# EAGLE board Alat_Cuci_Beras (EAGLE 9.6.2)
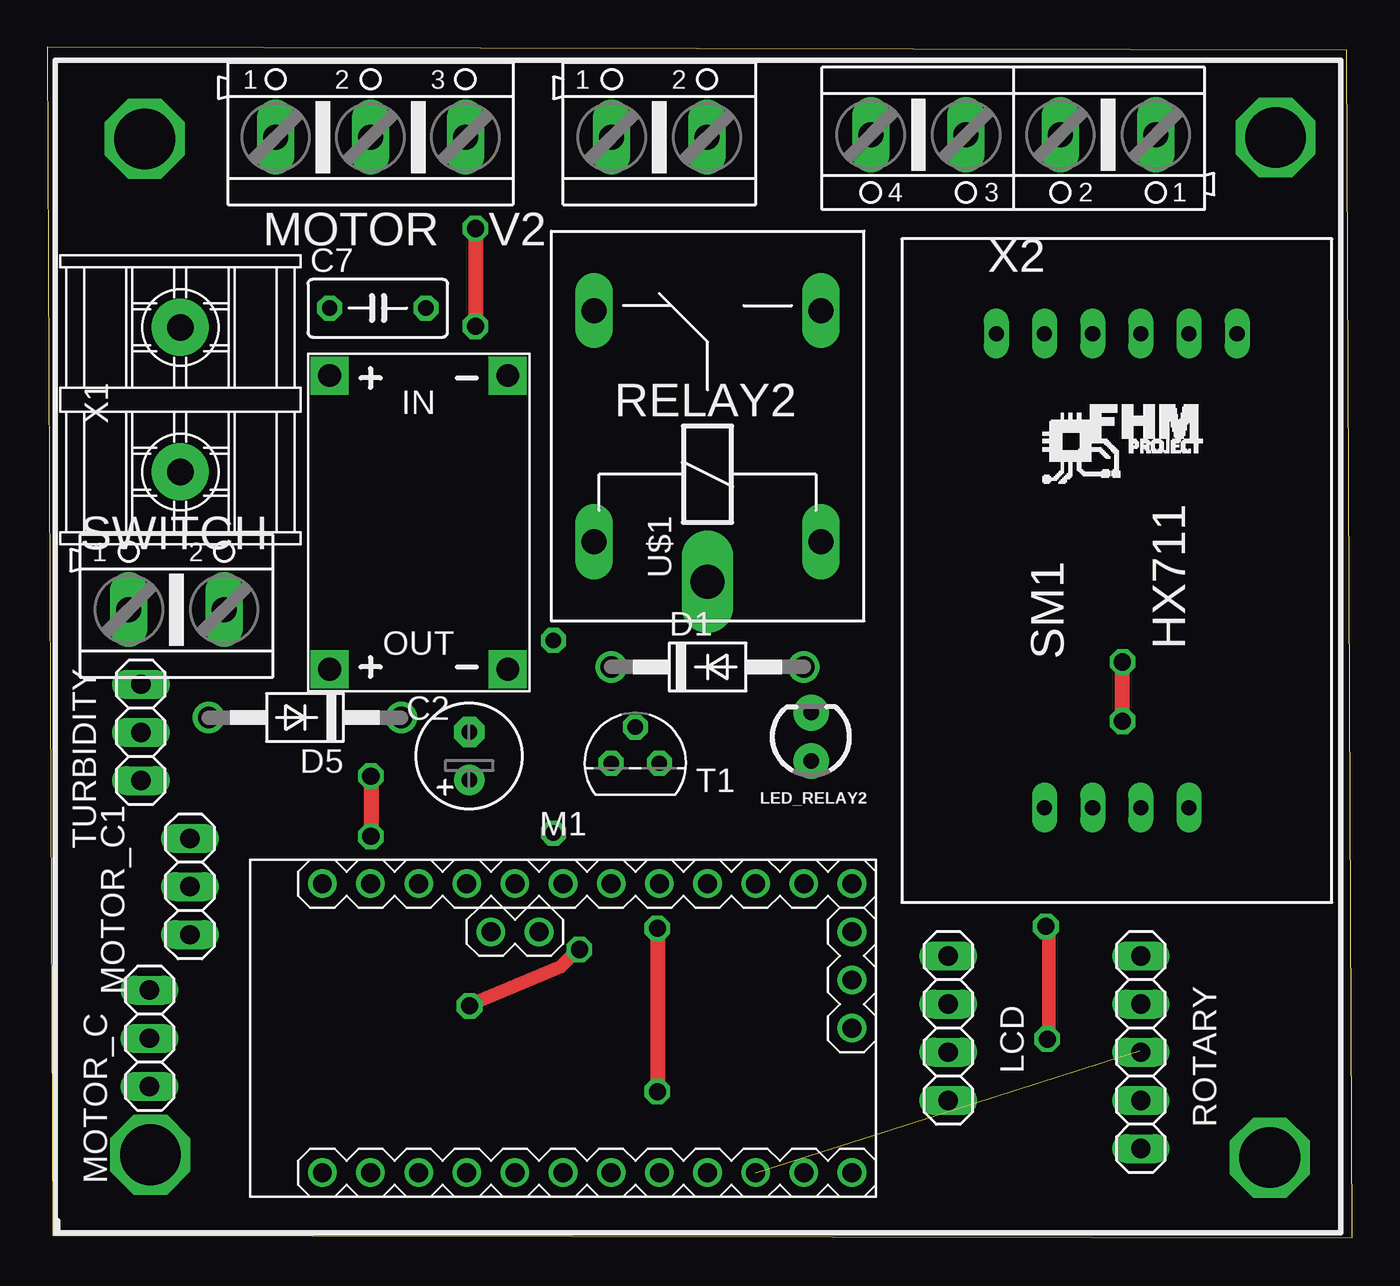
[diagram p0: board, top side]
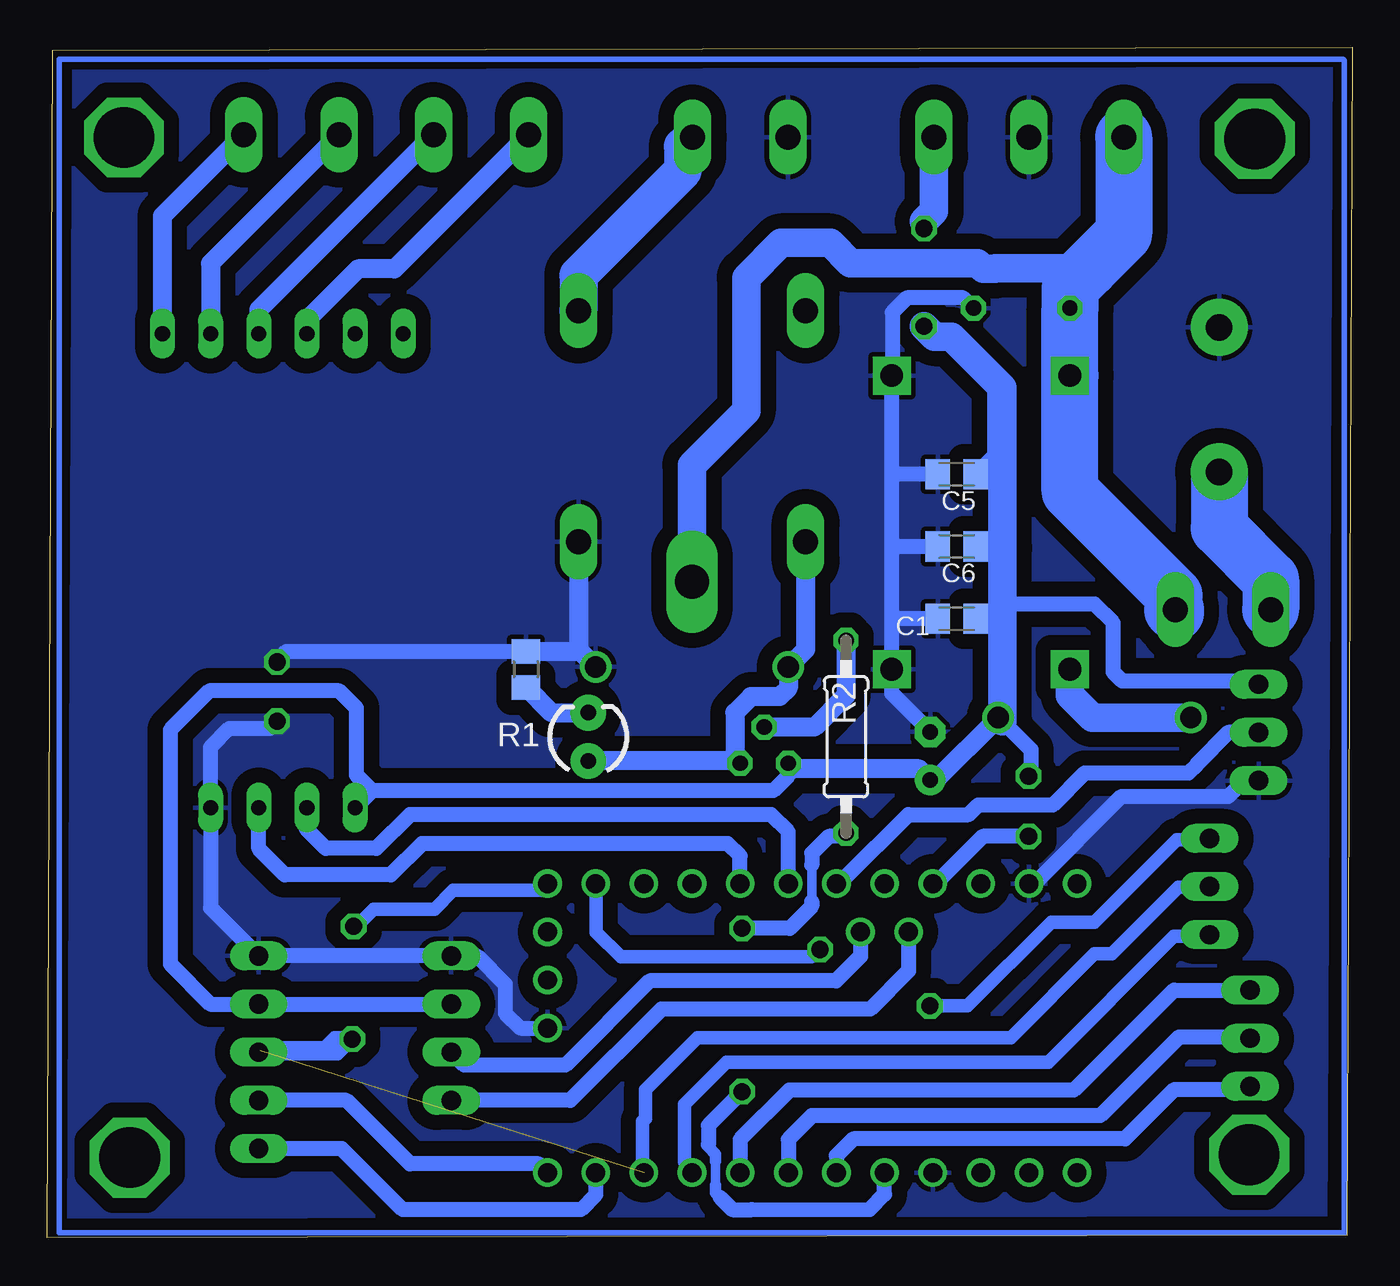
[diagram p1: board, bottom side, seen from below]

Size 68.83 x 62.78 mm. Coordinates in mm from the lower left corner, seen from the top.
Outline: 0.28,0.14 68.83,0 68.55,62.64 0,62.78 0.28,0.14
Copper layers (1*16): Top 0.035mm / dielectric 1.5mm / Bottom 0.035mm
Design rules "default": minimum track width 6mil, minimum drill 0.35mm, track to track 6mil, track to pad 6mil, pad to pad 6mil, via to via 6mil, smd to smd 6mil, copper to edge 40mil, drill to drill 6mil, minimum pad ring 10mil, minimum via ring 8mil, stop-mask expansion 4mil, vias tented up to drill 0mil, thermal gap 10mil

## Footprints (pad centres in the part's own frame; a part is rotated, then mirrored left to right if it is on the bottom)
C0805K = smd 1.3 x 1.6: 1 -1,0; 2 1,0
E2,5-6 = drill 0.813 pad 1.6: + -1.27,0 | drill 0.813 pad 1.6 octagon: - 1.27,0
C050-030X075 = drill 0.813 octagon: 1 -2.54,0; 2 2.54,0
DO41-10 = drill 1.118: A 5.08,0; C -5.08,0
1X04 = drill 1.016 long: 1 -3.81,0; 2 -1.27,0; 3 1.27,0; 4 3.81,0
LED_3MM = drill 0.813 pad 1.88: A -1.27,0; K 1.27,0
ARDUINO-PRO-MINI#NP = drill 1: J2.1 -1.27,5.08; J2.2 -3.81,5.08; J3.1 15.24,0; J3.2 15.24,2.54; J3.3 15.24,5.08; J6.1 -12.7,7.62; J6.2 -10.16,7.62; J6.3 -7.62,7.62; J6.4 -5.08,7.62; J6.5 -2.54,7.62; J6.6 0,7.62; J6.7 2.54,7.62; J6.8 5.08,7.62; J6.9 7.62,7.62; J6.10 10.16,7.62; J6.11 12.7,7.62; J6.12 15.24,7.62; J7.1 15.24,-7.62; J7.2 12.7,-7.62; J7.3 10.16,-7.62; J7.4 7.62,-7.62; J7.5 5.08,-7.62; J7.6 2.54,-7.62; J7.7 0,-7.62; J7.8 -2.54,-7.62; J7.9 -5.08,-7.62; J7.10 -7.62,-7.62; J7.11 -10.16,-7.62; J7.12 -12.7,-7.62
AK500/3 = drill 1.321 long: 1 -5.004,0; 2 0,0; 3 5.004,0
1X03 = drill 1.016 long: 1 -2.54,0; 2 0,0; 3 2.54,0
R0805 = smd 1.3 x 1.5: 1 -0.95,0; 2 0.95,0
0207/10 = drill 0.813 octagon: 1 -5.08,0; 2 5.08,0
ZF112 = drill 1.321 long: 1 -6.096,5.994; 2 -6.096,-5.994; O 6.096,5.994; S 6.096,-5.994 | drill 1.803 long: P -8.204,0
1X05 = drill 1.016 long: 1 -5.08,0; 2 -2.54,0; 3 0,0; 4 2.54,0; 5 5.08,0
HX711 = drill 0.8 long: A0 -12.5,6.35; A1 -12.5,3.81; A2 -12.5,1.27; A3 -12.5,-1.27; A4 -12.5,-3.81; A5 -12.5,-6.35; D0 12.5,3.81; D1 12.5,1.27; D2 12.5,-1.27; D3 12.5,-3.81
AK500/2 = drill 1.321 long: 1 -2.515,0; 2 2.515,0
TO92 = drill 0.813 octagon: 1 1.27,0; 2 0,1.905; 3 -1.27,0
DC-DC-STEP-DOWN-MP2307 = drill 1.2 pad 2 square: IN+ -7.747,-4.699; IN- -7.747,4.699; OUT+ 7.747,-4.699; OUT- 7.747,4.699
PCB_TERMINAL_2PIN = drill 1.4 pad 3: 1 -3.81,0; 2 3.81,0
AK500/4 = drill 1.321 long: 1 -7.518,0; 2 -2.489,0; 3 2.489,0; 4 7.518,0

## Placement (x,y rotation side)
C1  100nF  [C0805K]  20.86,32.65 180 bottom
C2  [E2,5-6]  22.25,25.41 90 top
C5  100nF  [C0805K]  20.86,40.27 180 bottom
C6  100nF  [C0805K]  20.86,36.46 180 bottom
C7  [C050-030X075]  17.43,49.03 0 top
D1  1N4004  [DO41-10]  34.83,30.11 0 top
D5  1N4004  [DO41-10]  13.59,27.44 180 top
FRAME1  FRAME-LETTER  [CREATIVE_COMMONS]  10.46,-9.64 0 top  (outside the outline)
LCD  [1X04]  47.53,11.06 270 top
LED_RELAY2  [LED_3MM]  40.29,26.42 90 top
M1  ARDUINO-PRO-MINI-5.0V#NP  [ARDUINO-PRO-MINI#NP]  27.21,11.06 0 top
MOTOR  [AK500/3]  17.05,58.05 0 top
MOTOR_C  [1X03]  5.39,10.52 270 top
MOTOR_C1  [1X03]  7.52,18.52 270 top
R1  1k  [R0805]  43.59,29.98 270 bottom
R2  1k  [0207/10]  26.7,26.42 90 bottom
RELAY2  ZF112  [ZF112]  34.83,42.81 90 top
ROTARY  [1X05]  57.69,9.79 270 top
SM1  [HX711]  56.42,35.19 270 top
SWITCH  [AK500/2]  6.81,33.13 0 top
T1  BC547  [TO92]  31.02,25.03 0 top
TURBIDITY  [1X03]  4.93,26.65 270 top
U$1  DC-DC-STEP-DOWN-MP2307  [DC-DC-STEP-DOWN-MP2307]  19.59,37.73 270 top
V2  [AK500/2]  32.29,58.05 0 top
X1  PCB_TERMINAL_2PIN  [PCB_TERMINAL_2PIN]  7.01,44.2 90 top
X2  [AK500/4]  50.96,58.17 180 top

## Library data of the parts
C1 C2 C5-C7 = rcl; SPICEPREFIX: C
D1 D5 = diode
FRAME1 = SparkFun-Aesthetics
LCD MOTOR_C MOTOR_C1 ROTARY TURBIDITY = pinhead
LED_RELAY2 = SparkFun-LED; PROD_ID: DIO-08794
M1 U$1 = diy-modules
MOTOR SWITCH V2 X2 = con-ptr500; OC_FARNELL: unknown; OC_NEWARK: unknown
R1 R2 = rcl; SPICEPREFIX: R
RELAY2 = relay; OC_FARNELL: unknown; OC_NEWARK: unknown
SM1 = hx711
T1 = transistor
X1 = PCB_Terminal

## Nets
12V: C7.1 MOTOR.1 RELAY2.P SWITCH.2 U$1.IN+
A0: M1.J6.8 SM1.D1
A1: M1.J6.7 SM1.D2
A2: M1.J6.6 TURBIDITY.2
A3: M1.J6.5
A6: M1.J3.2
A7: M1.J3.3
D2: M1.J7.8 R2.1
D3: M1.J7.7 MOTOR_C.3
D4: M1.J7.6 MOTOR_C.2
D5: M1.J7.5 MOTOR_C.1
D6: M1.J7.4
D7: M1.J7.3 ROTARY.3
D8: M1.J7.2 ROTARY.5
D9: M1.J7.1 ROTARY.4
D10: M1.J6.12
D11: M1.J6.11
D12: M1.J6.10
D13: M1.J6.9
GND: C1.2 C2.- C5.2 C6.2 C7.2 D1.A LCD.1 M1.J3.1 M1.J6.2 M1.J7.9 MOTOR.2 R1.1 RELAY2.2 ROTARY.1 SM1.D0 TURBIDITY.3 U$1.IN- U$1.OUT- V2.1 X1.2
N$1: D1.C LED_RELAY2.A RELAY2.1 T1.1
N$2: SWITCH.1 X1.1
N$3: D5.A U$1.OUT+
N$4: LED_RELAY2.K R1.2
N$5: R2.2 T1.2
N$6: SM1.A0 X2.1
N$7: SM1.A1 X2.2
N$8: SM1.A2 X2.3
N$9: RELAY2.S V2.2
N$10: SM1.A3 X2.4
RAW: M1.J6.1
RX: M1.J7.11
SCL: LCD.4 M1.J2.2
SDA: LCD.3 M1.J2.1
TX: M1.J7.12
VCC: C1.1 C2.+ C5.1 C6.1 D5.C LCD.2 M1.J6.4 MOTOR.3 ROTARY.2 SM1.D3 T1.3 TURBIDITY.1

## Tracks (layer width: path | path; a pad name or v marks a point on that pad's centre or on a via)
12V
  Bottom 1.5: 13.85,51.13 18.81,51.13 18.85,51.09 19.45,51.09 19.76,51.4 26.47,51.4 27.53,52.47 30.12,52.47 31.95,50.64 31.95,43.63 34.83,40.75 RELAY2.P
  Bottom 3: SWITCH.2 9.33,32.96 9.4,33.04 | 9.47,33.11 9.4,33.04 | 9.4,33.04 9.4,33.88 14.89,39.37 U$1.IN+ C7.1 14.89,50.1 13.85,51.13 12.04,52.94 MOTOR.1
A0
  Bottom 0.8: M1.J6.8 32.29,20.14 32.94,20.79 49.07,20.79 50.72,19.14 56.31,19.14 57.69,20.52 SM1.D1
A1
  Bottom 0.8: M1.J6.7 29.75,21.41 30.66,22.32 49.71,22.32 51.48,20.54 54.15,20.54 55.17,21.55 55.17,22.67 SM1.D2
A2
  Bottom 0.8: M1.J6.6 26.87,19.01 26.72,19.01 23.42,22.32 20.24,22.32 19.73,22.82 15.8,22.82 14.12,24.5 8.63,24.5 8.18,24.96 8.18,25.01 6.53,26.65 TURBIDITY.2
D2  (via drill 0.9)
  Top 0.8: v32.18,16.32 v32.18,7.71
  Bottom 0.5: 28.5,19.65 28.5,17.74 | 33.58,4.03 33.58,2.76
  Bottom 0.6: 33.96,4.92 33.96,4.79 33.58,4.41 33.58,4.03 | 33.58,2.76 33.58,2.38 33.32,2.12
  Bottom 0.8: R2.1 26.87,21.17 27.61,21.17 28.5,20.28 28.5,19.65 | 28.5,17.74 28.5,17.49 29.67,16.32 v32.18,16.32 | v32.18,7.71 33.96,5.93 33.96,4.92 | 33.32,2.12 32.69,1.49 31.67,1.49 25.45,1.5 24.67,2.29 M1.J7.8
D3
  Bottom 0.8: MOTOR_C.3 5.54,7.83 9.38,7.83 11.99,5.22 26.31,5.22 27.21,4.33 M1.J7.7
D4
  Bottom 0.8: MOTOR_C.2 5.47,10.6 9.13,10.6 13.28,6.44 28.5,6.44 29.75,5.19 M1.J7.6
D5
  Bottom 0.8: MOTOR_C.1 9.4,13.06 14.68,7.79 29.69,7.79 32.29,5.19 M1.J7.5
D7  (1 unrouted)
  Bottom 0.8: 57.6,9.87 ROTARY.3
D8
  Bottom 0.8: M1.J7.2 39.91,2.27 40.69,1.49 50.09,1.49 53.3,4.71 ROTARY.5
D9
  Bottom 0.8: M1.J7.1 42.91,3.9 49.71,3.9 53.05,7.25 ROTARY.4
GND  (via drill 0.9)
  Top 0.8: v56.72,27.24 v56.72,30.37
  Bottom 0.3: 0.4,0.27 68.22,0.27 68.22,62.14 0.48,62.14 0.4,62.07 0.4,0.27
  Bottom 0.8: C7.2 20.51,49.57 23.49,49.57 24.26,48.81 24.26,45.5 U$1.IN- 24.29,40.12 | 24.29,32.58 U$1.OUT- 24.29,28.71 C2.- | 24.29,32.58 24.29,36.24 | 24.29,36.24 24.29,40.12 | C5.2 24.14,40.27 24.29,40.12 | C6.2 24.07,36.46 24.29,36.24 | C1.2 24.22,32.65 24.29,32.58 | TURBIDITY.3 5.69,24.11 6.53,23.27 12.17,23.27 16.77,18.68 M1.J6.2 | M1.J3.1 43.88,11.06 44.68,11.85 44.68,13.38 46.17,14.87 LCD.1 ROTARY.1 60.23,17.41 SM1.D0 60.23,25.87 59.23,26.86 57.1,26.86 v56.72,27.24 | v56.72,30.37 56.34,30.75 56.34,30.83 56.23,30.93 R1.1
  Bottom 1: RELAY2.2 40.82,31.02 40.73,30.93 | 40.73,30.93 D1.A | R1.1 40.73,30.93
  pour Bottom (isolate 0.8): 0.43,0.22 68.25,0.22 68.25,62.07 0.43,62.07
N$1
  Bottom 1: RELAY2.1 28.83,31.02 D1.C 29.75,28.99 30.2,28.54 31.72,28.54 32.56,27.7 32.56,25.3 T1.1 32.41,25.15 LED_RELAY2.A
N$2
  Bottom 3: X1.1 7.01,37.44 4.3,34.72 SWITCH.1
N$3
  Bottom 1.5: D5.A 13.71,27.44 14.89,28.62 U$1.OUT+
N$4
  Bottom 1: R1.2 42.25,27.69 LED_RELAY2.K
N$5
  Bottom 1: R2.2 26.7,28.61 28.38,26.93 T1.2
N$6
  Bottom 1: X2.1 62.77,53.88 SM1.A0
N$7
  Bottom 1: X2.2 60.23,51.39 SM1.A1
N$8
  Bottom 1: X2.3 57.69,48.95 SM1.A2
N$9
  Bottom 2: V2.2 35.3,57.54 35.3,56.28 40.82,50.76 RELAY2.S
N$10
  Bottom 1: X2.4 50.52,51.09 52.45,51.09 55.19,48.35 55.19,47.73 SM1.A3
N$11  (via drill 3.2)
  other vias: 64.79,58.03
N$12  (via drill 3.2)
  other vias: 64.49,4.23
N$13  (via drill 3.2)
  other vias: 5.13,57.95
N$14  (via drill 3.2)
  other vias: 5.43,4.38
S$1
  Bottom 0.7: 42.39,18.79 42.85,18.33 47.42,18.33 48.41,17.34 51.61,17.34 52.6,16.35
S$2  (via drill 0.9)
  other vias: 52.68,16.42
S$3  (via drill 0.9)
  Bottom 0.7: v52.75,10.48 53.52,9.72 53.82,9.72 | 57.63,9.72 53.82,9.72 | 53.82,9.72 52.98,10.56 53.67,10.56 54.2,10.02 57.4,10.02
S$4
  Top 0.7: 52.83,16.35 52.83,10.71 52.53,10.4
S$5
  Bottom 0.7: 39.88,18.94 39.88,16.12 38.58,14.82 28.52,14.82 28.14,15.2
S$6  (via drill 0.9)
  Top 0.7: v28.07,15.2 27.99,15.2 27.08,14.3 22.35,12.31
S$7
  Bottom 0.7: 34.77,3.55 35.23,4 35.23,7.05 33.02,9.26 16.03,9.26 9.4,15.89 7.42,15.89
S$8
  Bottom 0.7: 37.44,3.77 37.44,6.14 37.29,6.29 37.29,7.81 34.54,10.56 18.01,10.56 13.59,14.98 12.67,14.98 9.17,18.48 7.57,18.48
S$9  (via drill 0.9)
  Bottom 0.7: 7.64,21 9.24,21 13.59,16.65 15.87,16.65 20.29,12.23 v22.27,12.23
SCL
  Bottom 0.8: M1.J2.2 23.4,14.08 25.42,12.05 36.45,12.05 41.26,7.25 LCD.4
SDA
  Bottom 0.8: M1.J2.1 25.94,14.84 27.23,13.55 37.06,13.55 41.5,9.11 46.85,9.11 LCD.3
VCC  (via drill 0.9)
  Top 0.8: v22.58,53.23 v22.58,48.07 | v17.07,24.35 v17.07,21.17
  Bottom 0.8: C5.1 18.87,41.26 18.87,45.25 20.98,47.36 | 22.58,53.61 v22.58,53.23 | C1.1 18.53,32.65 18.44,32.73 | 18.44,36.39 18.51,36.46 C6.1 | TURBIDITY.1 5.12,29.38 12.14,29.38 12.6,29.83 12.6,32.43 13.59,33.42 18.44,33.42 | T1.3 29.75,24.37 30.53,23.59 51.71,23.59 | 51.71,23.59 SM1.D3 | 18.67,27.47 18.44,27.24 16.94,25.74 16.94,24.48 v17.07,24.35 | v17.07,21.17 19.48,21.17 21.98,18.68 M1.J6.4 | 51.71,23.59 52.53,24.41 52.53,27.93 53.44,28.84 60.3,28.84 62.36,26.79 62.36,14.44 60.24,12.33 ROTARY.2 LCD.2
  Bottom 1: D5.C 21.98,24.14 C2.+ 22.85,24.73 29.45,24.73 T1.3
  Bottom 1.5: D5.C 18.67,27.47 | 18.44,27.24 18.44,32.73 18.44,33.42 18.44,36.39 18.44,44.83 20.98,47.36 21.14,47.53 22.03,47.53 v22.58,48.07 | MOTOR.3 22.05,54.14 22.58,53.61

## Text on the board
tPlace: C:/Users/NUHKA ART/Pictures/LogoFHMlcd.bmp'
200bmp: C:/Users/NUHKA ART/Pictures/Fahmi Project logo.bmp'